# Altium PCB picr22-team-owo-mainboard.PcbDoc
Units mm, origin at the board's own origin, x right, y up, seen from the top; angles counter-clockwise.
Board outline 50 x 50 mm, 4 copper layers (Top Layer, GND1, GND, Bottom Layer), stack 1.586 mm thick; 94 components, 62 nets, 342 pads, 179 vias.
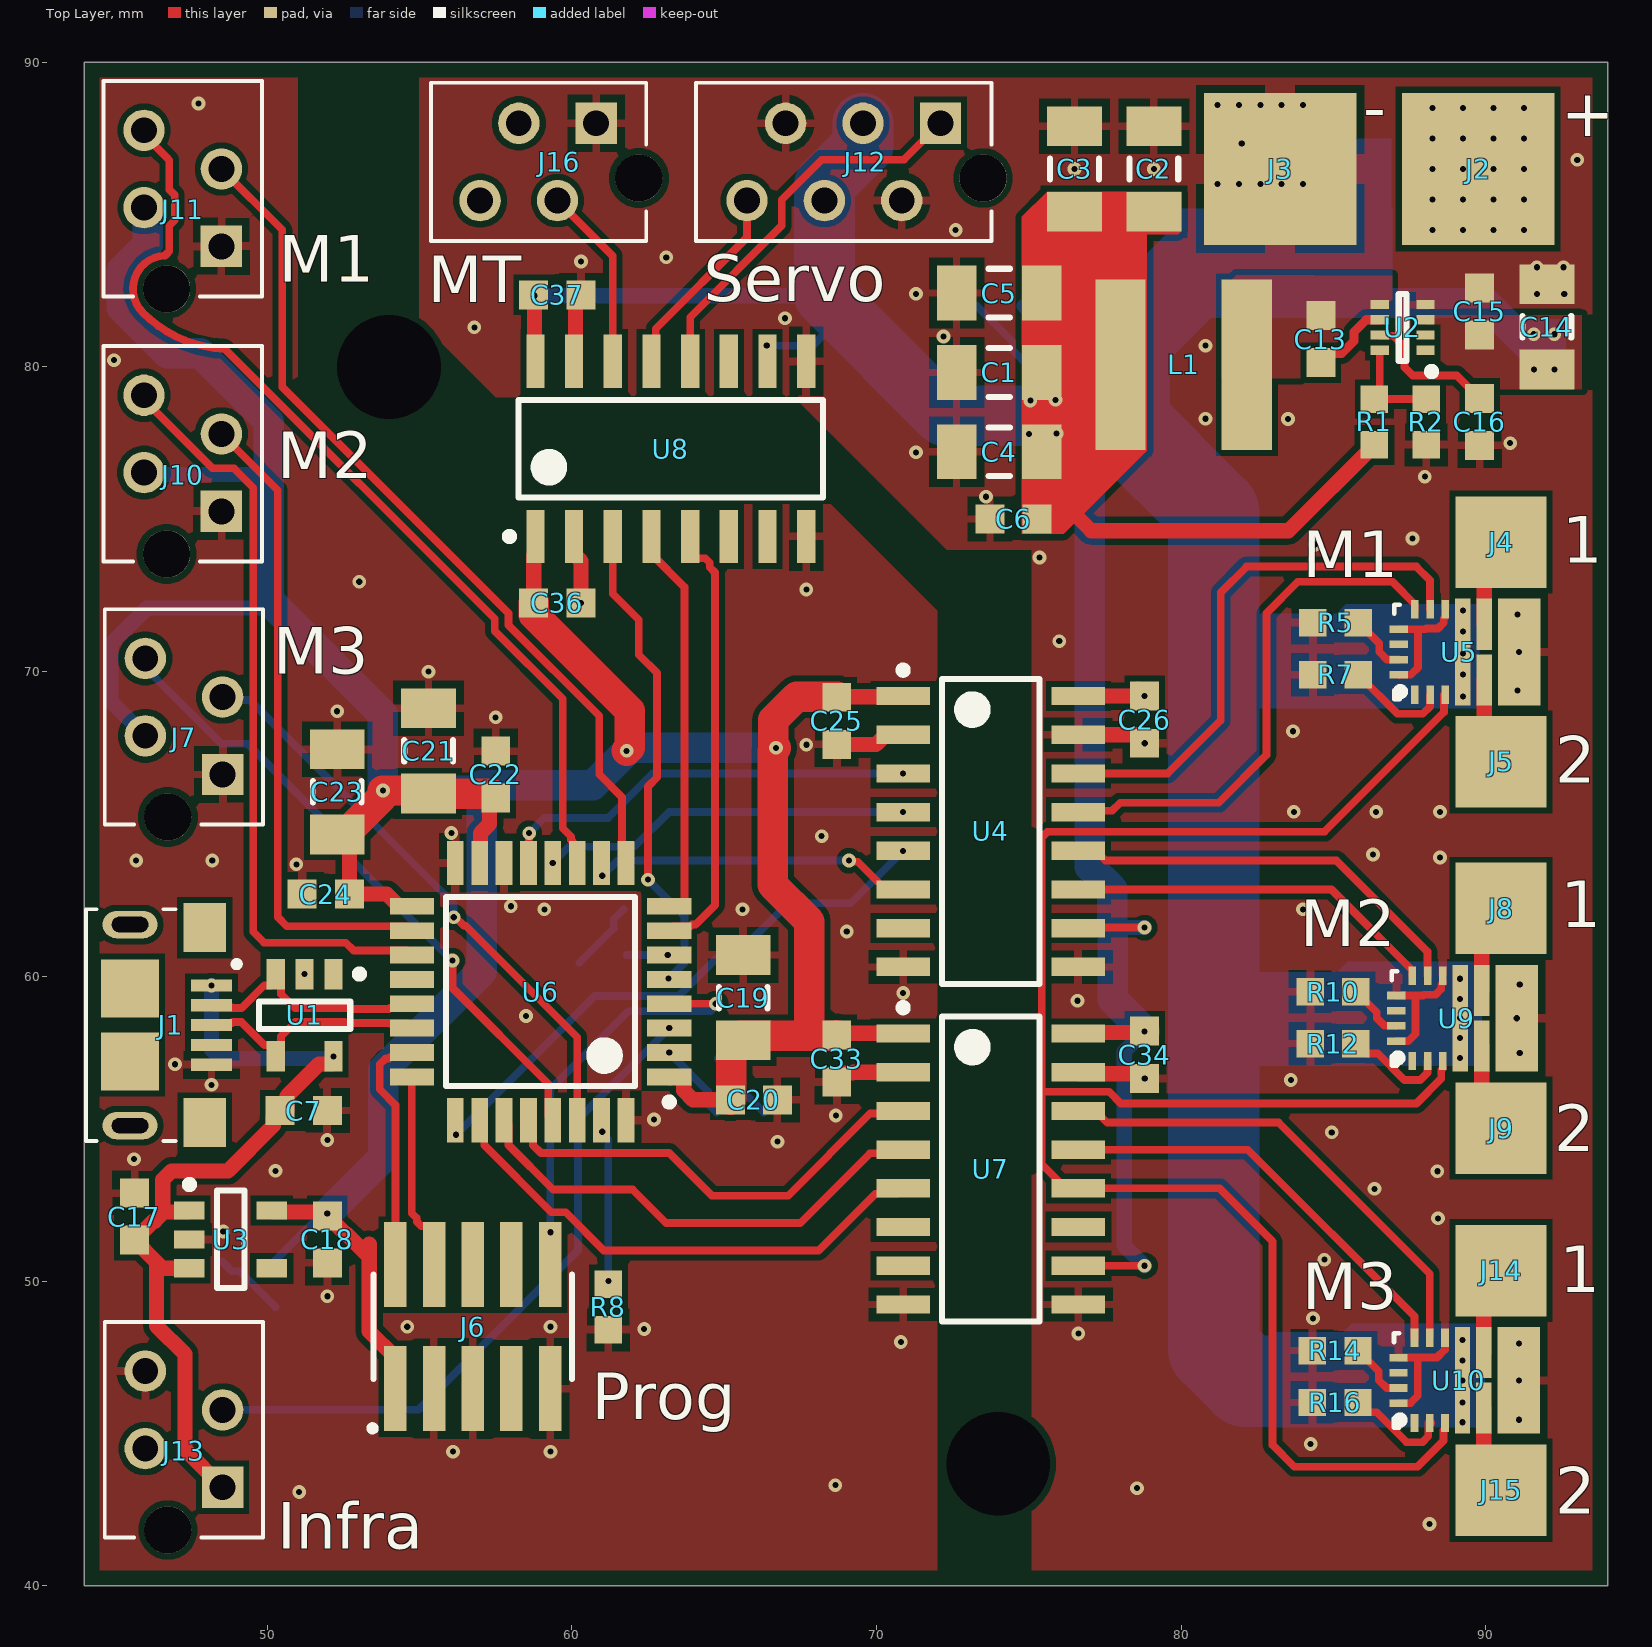
[diagram p0: Top Layer view]
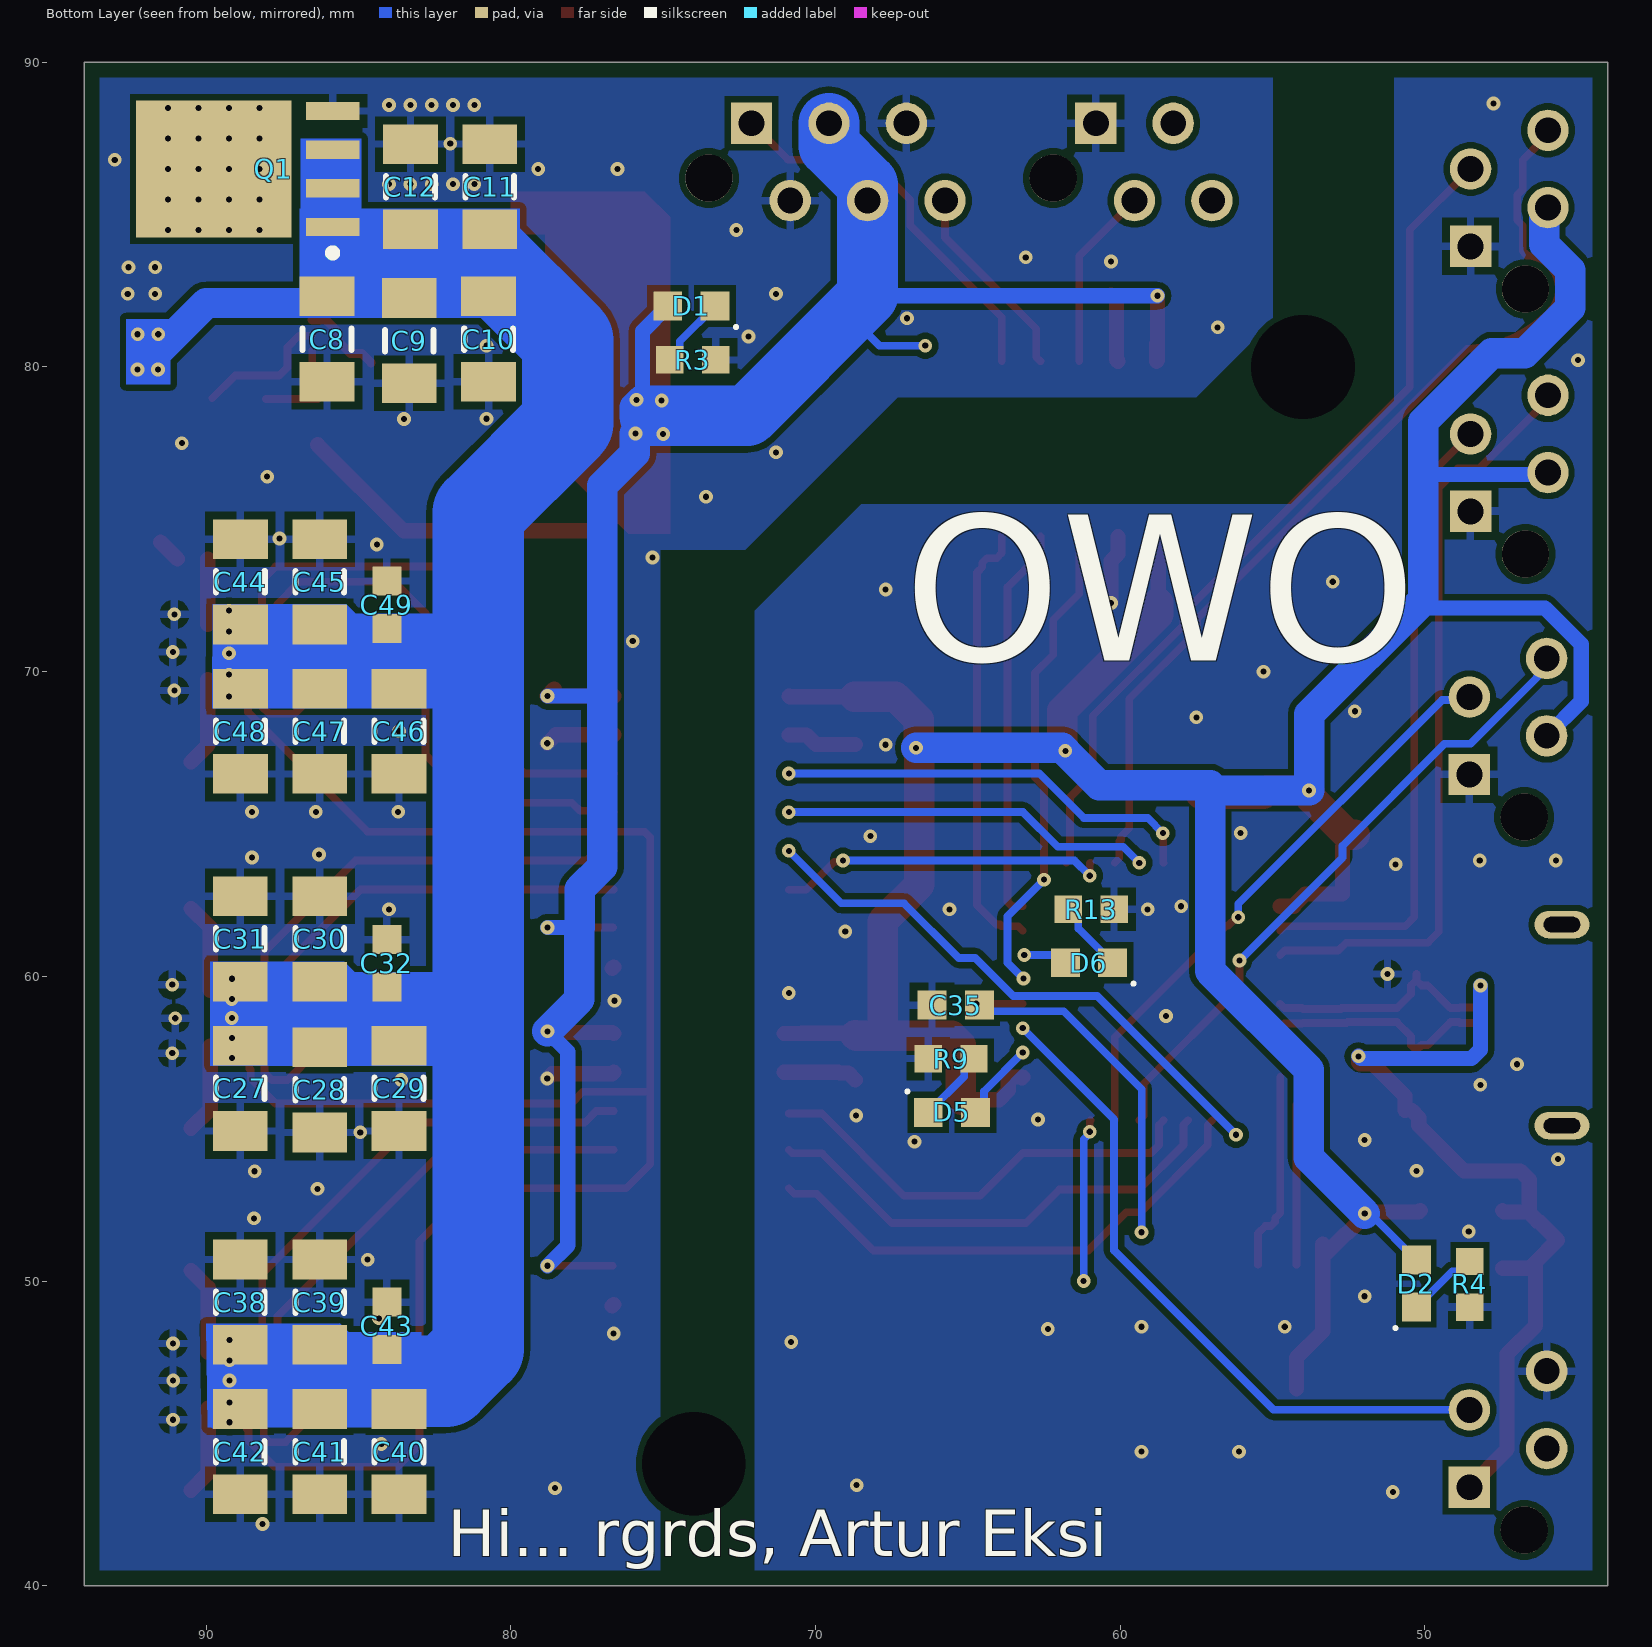
[diagram p1: Bottom Layer view, seen from below]
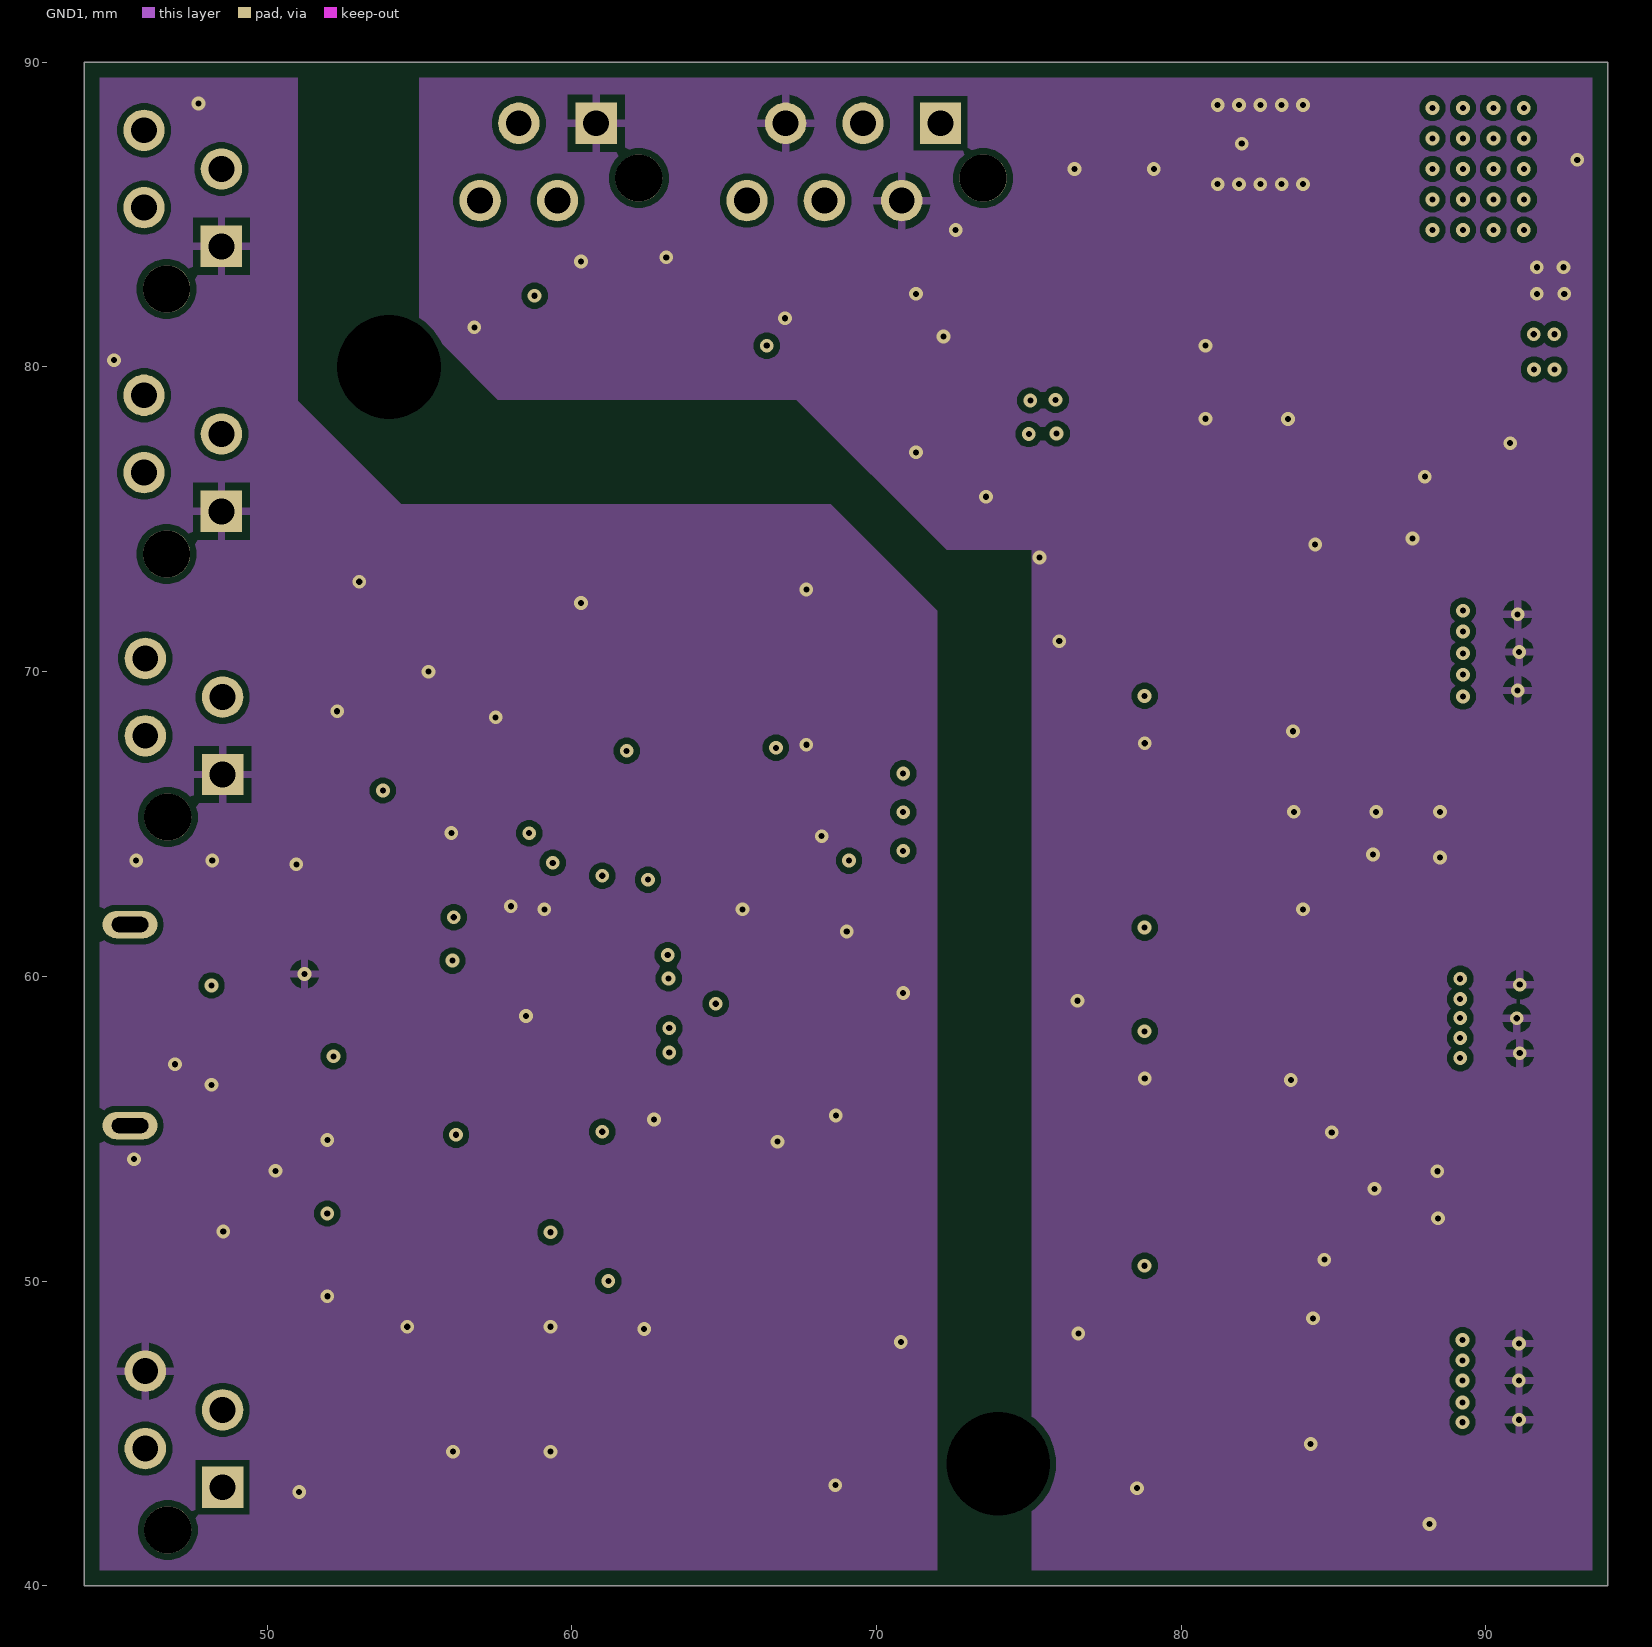
[diagram p2: GND1]
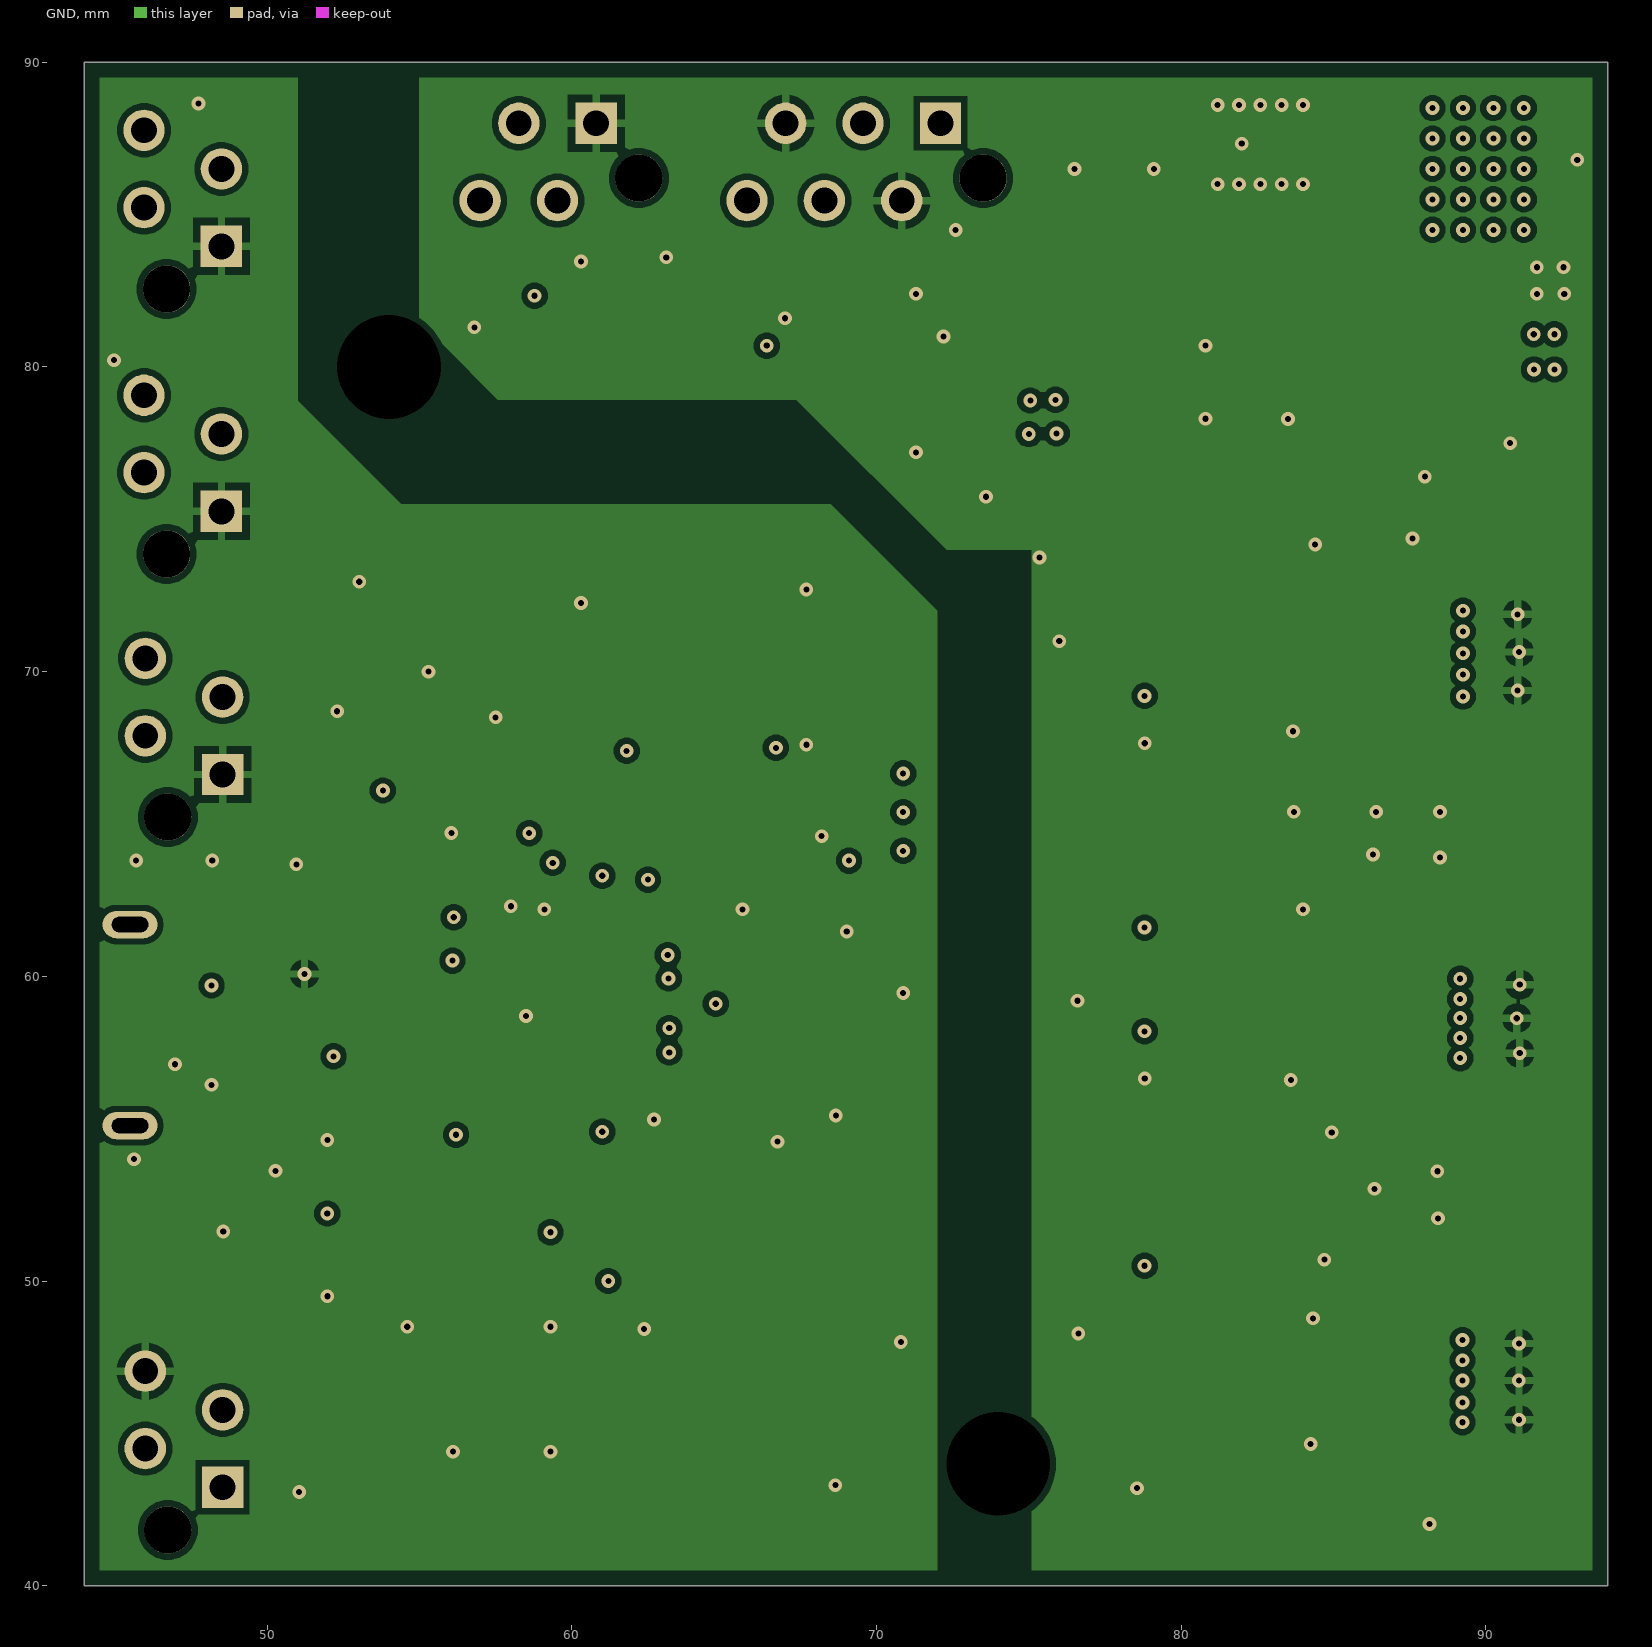
[diagram p3: GND]
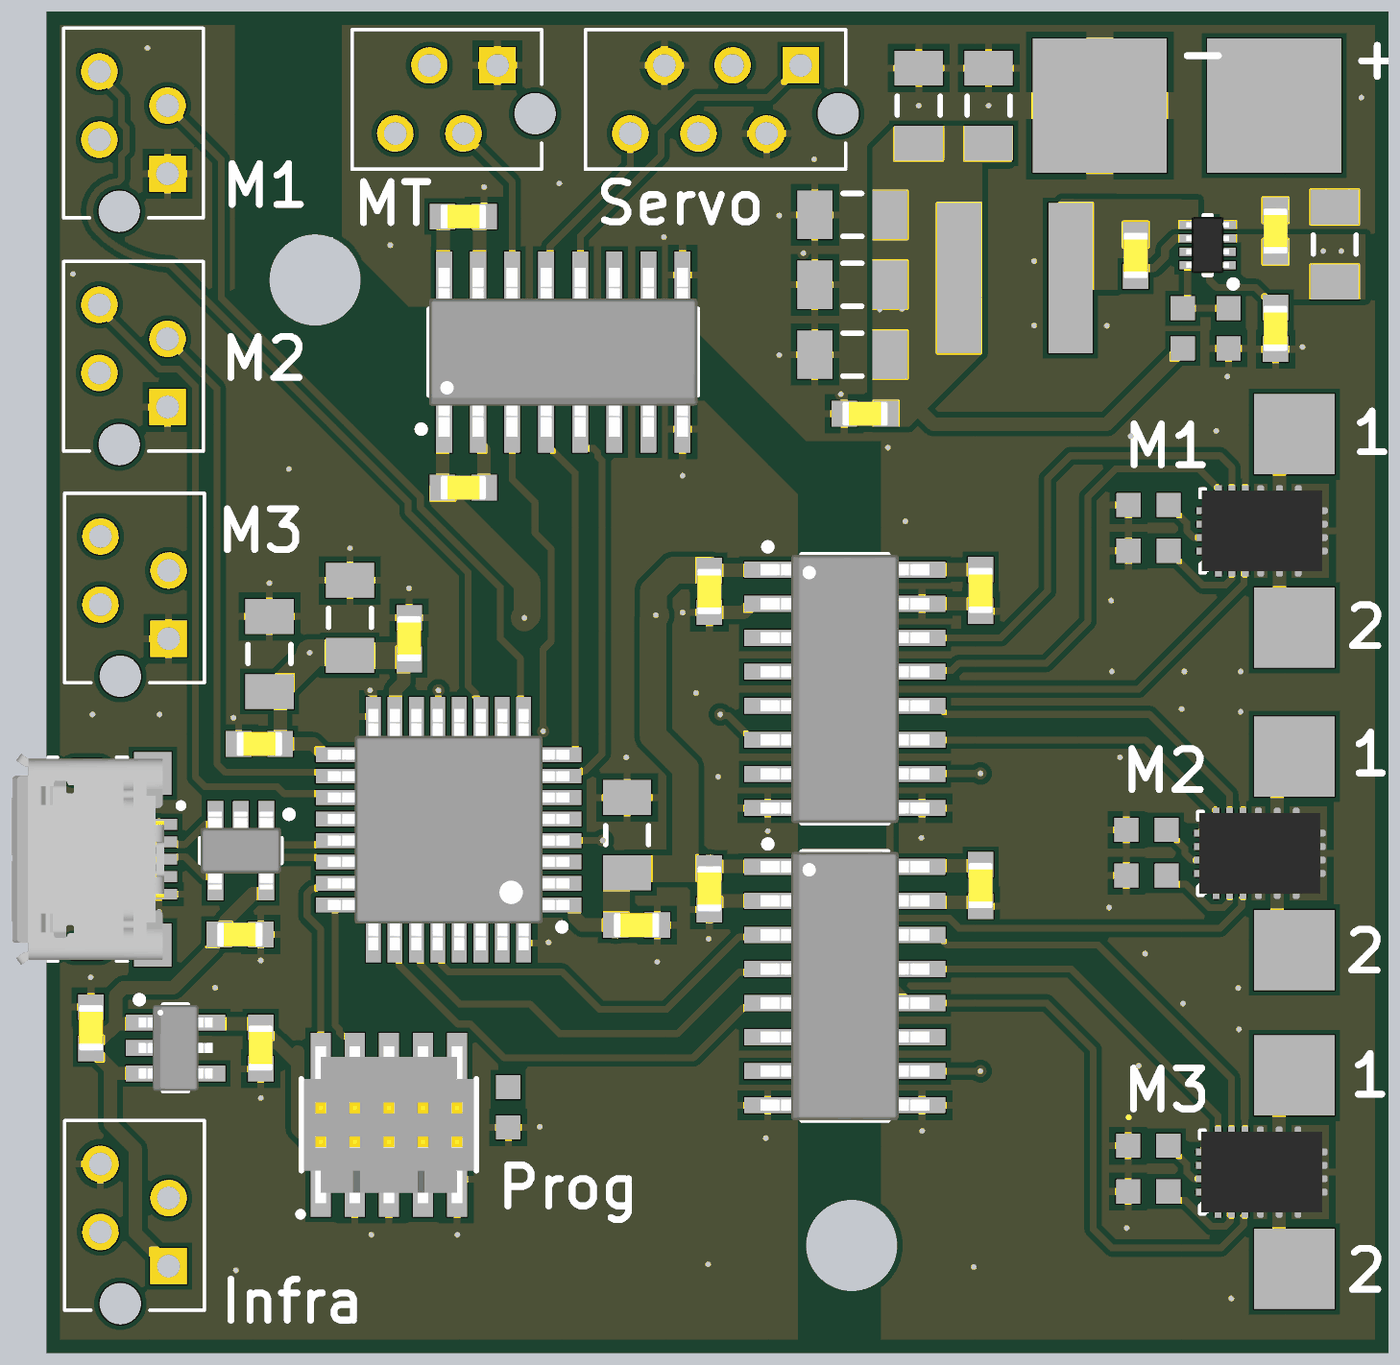
[diagram p4: 3D render of the assembled board from above, using the file's embedded part models]

## Layer stack, top to bottom
Top Solder: solder mask 0.0203, Solder Resist, Dk 3.8
Top Layer: signal copper 0.035
Dielectric 1: prepreg 0.2104, 7628, Dk 4.6
GND1: signal copper 0.0152
Dielectric 2: core 1.065, Core, Dk 4.6
GND: signal copper 0.0152
Dielectric 3: prepreg 0.2104, 7628, Dk 4.6
Bottom Layer: signal copper 0.035
Bottom Solder: solder mask 0.0203, Solder Resist, Dk 3.8

## Board outline
94,90 94,40 44,40 44,90

## Design rules (kind name [scope] priority, off if disabled: settings)
Clearance [All] p1: gap=0.2 ignorepadtopadclearanceinfootprint=TRUE except(0: Arc-Hole Track-Hole SMDPad-Hole THPad-Hole Via-Hole Fill-Hole Poly-Hole Region-Hole Text-Hole)
DiffPairsRouting DiffPairsRoutingUSB [InDifferentialPairClass('USB')] p1: maxlimit=0.2 minlimit=0.2 mostfreqgap=0.2 toplayer_minwidth=0.26 toplayer_maxwidth=0.26 toplayer_prefwidth=0.26 midlayer1_minwidth=0.26 midlayer1_maxwidth=0.26 midlayer1_prefwidth=0.26 midlayer2_minwidth=0.26 midlayer2_maxwidth=0.26 midlayer2_prefwidth=0.26 bottomlayer_minwidth=0.26 bottomlayer_maxwidth=0.26 bottomlayer_prefwidth=0.26 maxuncoupledlength=12.7
DiffPairsRouting [All] p2: maxlimit=0.254 minlimit=0.254 mostfreqgap=0.254 toplayer_minwidth=0.381 toplayer_maxwidth=0.381 toplayer_prefwidth=0.381 midlayer1_minwidth=0.381 midlayer1_maxwidth=0.381 midlayer1_prefwidth=0.381 midlayer2_minwidth=0.381 midlayer2_maxwidth=0.381 midlayer2_prefwidth=0.381 bottomlayer_minwidth=0.381 bottomlayer_maxwidth=0.381 bottomlayer_prefwidth=0.381 maxuncoupledlength=12.7
HoleSize [All] p1: absolutevalues=TRUE maxlimit=5 minlimit=0.025 maxpercent=80.000 minpercent=20.000
MinimumSolderMaskSliver [All] p1: minsoldermaskwidth=0.1
PolygonConnect PolygonConnectDIrect [InNet('NetC13_1') or InNet('VBAT') or ((ObjectKind = 'Poly') And (Name = 'GND_SWREG_IN'))] p1: connectstyle=Direct reliefconductorwidth=0.254 reliefentries=4 polygonreliefangle="90 Angle" airgapwidth=0.254
PolygonConnect [All] p2: thpad.connectstyle=Relief thpad.reliefconductorwidth=0.254 thpad.reliefentries=4 thpad.polygonreliefangle="90 Angle" thpad.airgapwidth=0.254 smdpad.connectstyle=Relief smdpad.reliefconductorwidth=0.254 smdpad.reliefentries=4 smdpad.polygonreliefangle="90 Angle" smdpad.airgapwidth=0.254 via.connectstyle=Direct via.reliefconductorwidth=0.254 via.reliefentries=4 via.polygonreliefangle="90 Angle" via.airgapwidth=0.254
RoutingVias [All] p1: holewidth=0.2 width=0.45 viastyle="Through Hole" minholewidth=0.2 minwidth=0.4 maxholewidth=1 maxwidth=1.5
SilkToSolderMaskClearance [IsPad] p1: minsilkscreentomaskgap=0.17 clearancetoexposedcopper=TRUE
SolderMaskExpansion SolderMaskExpansionVia [IsVia] p1: expansion=0.102 istentingtop=TRUE
SolderMaskExpansion [All] p2: expansion=0.05 istentingtop=FALSE
Width [All] p1: maxlimit=3 minlimit=0.254 preferedwidth=0.254
26 further rules are at their usual default settings.

## Classes and differential pairs
differential pair class USB: USBdata
differential pair USBdata: +USBdata_P -USBdata_N

## Components (designator, comment, footprint, x,y, rotation, side; value= is the part's Value field where it differs from the comment)
C1 "Generic SMD capacitor" "Capacitor 1206" 74.029,79.821 r0 top value=10uF
C2 "Generic SMD capacitor" "Capacitor 1206" 79.104,86.5 r270 top value=10uF
C3 "Generic SMD capacitor" "Capacitor 1206" 76.5,86.5 r270 top value=10uF
C4 "Generic SMD capacitor" "Capacitor 1206" 74.029,77.217 r0 top value=10uF
C5 "Generic SMD capacitor" "Capacitor 1206" 74.029,82.426 r0 top value=10uF
C6 "Generic SMD capacitor" "Capacitor 0603" 74.5,75.013 r180 top value=100nF
C7 "Generic SMD capacitor" "Capacitor 0603" 51.2,55.596 r180 top value=100nF
C8 "Generic SMD capacitor" "Capacitor 1206" 86.033,80.916 r90 bottom value=10uF
C9 "Generic SMD capacitor" "Capacitor 1206" 83.333,80.866 r90 bottom value=10uF
C10 "Generic SMD capacitor" "Capacitor 1206" 80.729,80.916 r90 bottom value=10uF
C11 "Generic SMD capacitor" "Capacitor 1206" 80.691,85.916 r270 bottom value=10uF
C12 "Generic SMD capacitor" "Capacitor 1206" 83.296,85.916 r270 bottom value=10uF
C13 "Generic SMD capacitor" "Capacitor 0603" 84.587,80.916 r270 top value=100nF
C14 "Generic SMD capacitor" "Capacitor 1206" 92.004,81.319 r270 top value=10uF
C15 "Generic SMD capacitor" "Capacitor 0603" 89.8,81.825 r270 top value=100nF
C16 "Generic SMD capacitor" "Capacitor 0603" 89.8,78.196 r270 top value=33nF
C17 "Generic SMD capacitor" "Capacitor 0603" 45.647,52.115 r270 top value=1uF
C18 "Generic SMD capacitor" "Capacitor 0603" 51.974,51.365 r90 top value=1uF
C19 "Generic SMD capacitor" "Capacitor 1206" 65.629,59.3 r270 top value=4.7uF
C20 "Generic SMD capacitor" "Capacitor 0603" 65.979,55.946 r180 top value=100nF
C21 "Generic SMD capacitor" "Capacitor 1206" 55.3,67.4 r270 top value=4.7uF
C22 "Generic SMD capacitor" "Capacitor 0603" 57.504,66.625 r270 top value=100nF
C23 "Generic SMD capacitor" "Capacitor 1206" 52.3,66.054 r270 top value=4.7uF
C24 "Generic SMD capacitor" "Capacitor 0603" 51.925,62.7 r0 top value=100nF
C25 "Generic SMD capacitor" "Capacitor 0603" 68.696,68.385 r90 top value=100nF
C26 "Generic SMD capacitor" "Capacitor 0603" 78.804,68.425 r90 top value=100nF
C27 "Generic SMD capacitor" "Capacitor 1206" 88.88,56.323 r90 bottom value=10uF
C28 "Generic SMD capacitor" "Capacitor 1206" 86.275,56.273 r90 bottom value=10uF
C29 "Generic SMD capacitor" "Capacitor 1206" 83.671,56.323 r90 bottom value=10uF
C30 "Generic SMD capacitor" "Capacitor 1206" 86.275,61.227 r270 bottom value=10uF
C31 "Generic SMD capacitor" "Capacitor 1206" 88.88,61.227 r270 bottom value=10uF
C32 "Generic SMD capacitor" "Capacitor 0603" 84.071,60.427 r270 bottom value=100nF
C33 "Generic SMD capacitor" "Capacitor 0603" 68.696,57.3 r90 top value=100nF
C34 "Generic SMD capacitor" "Capacitor 0603" 78.804,57.425 r90 top value=100nF
C35 "Generic SMD capacitor" "Capacitor 0603" 65.4,59.054 r180 bottom value=100nF
C36 "Generic SMD capacitor" "Capacitor 0603" 59.525,72.257 r180 top value=100nF
C37 "Generic SMD capacitor" "Capacitor 0603" 59.525,82.366 r180 top value=100nF
C38 "Generic SMD capacitor" "Capacitor 1206" 88.88,49.304 r270 bottom value=10uF
C39 "Generic SMD capacitor" "Capacitor 1206" 86.275,49.304 r270 bottom value=10uF
C40 "Generic SMD capacitor" "Capacitor 1206" 83.671,44.4 r90 bottom value=10uF
C41 "Generic SMD capacitor" "Capacitor 1206" 86.275,44.4 r90 bottom value=10uF
C42 "Generic SMD capacitor" "Capacitor 1206" 88.88,44.4 r90 bottom value=10uF
C43 "Generic SMD capacitor" "Capacitor 0603" 84.071,48.529 r270 bottom value=100nF
C44 "Generic SMD capacitor" "Capacitor 1206" 88.88,72.948 r270 bottom value=10uF
C45 "Generic SMD capacitor" "Capacitor 1206" 86.275,72.948 r270 bottom value=10uF
C46 "Generic SMD capacitor" "Capacitor 1206" 83.671,68.044 r90 bottom value=10uF
C47 "Generic SMD capacitor" "Capacitor 1206" 86.275,68.044 r90 bottom value=10uF
C48 "Generic SMD capacitor" "Capacitor 1206" 88.88,68.044 r90 bottom value=10uF
C49 "Generic SMD capacitor" "Capacitor 0603" 84.071,72.198 r270 bottom value=100nF
D1 "LED" "DIODE 0603" 74.075,82 r180 bottom
D2 "LED" "DIODE 0603" 50.279,49.915 r270 bottom
D5 "LED" "DIODE 0603" 65.525,55.534 r0 bottom
D6 "LED" "DIODE 0603" 61.025,60.446 r180 bottom
J1 "10118193-0001LF" "USB port" 45.5,58.4 r270 top
J2 "BAT+" "5x5mm pad" 89.75,86.5 r90 top
J3 "BAT-" "5x5mm pad" 83.25,86.5 r90 top
J4 "M1OUT1" "3x3mm pad" 90.5,74.25 r90 top
J5 "M1OUT2" "3x3mm pad" 90.5,67.038 r90 top
J6 "FTSH-105-XX-X-DV" SAMTEC_FTSH-105-XX-X-DV 56.75,48.5 r0 top
J7 "215079-4" CONN_215079-4_TYC 44.44,72.326 r270 top
J8 "M1OUT1" "3x3mm pad" 90.5,62.229 r90 top
J9 "M1OUT2" "3x3mm pad" 90.5,55.017 r90 top
J10 "215079-4" CONN_215079-4_TYC 44.4,80.963 r270 top
J11 "215079-4" CONN_215079-4_TYC 44.4,89.66 r270 top
J12 "215079-6" CONN_215079-6_TYC 63.825,83.88 r0 top
J13 "215079-4" CONN_215079-4_TYC 44.44,48.93 r270 top
J14 "M1OUT1" "3x3mm pad" 90.5,50.343 r90 top
J15 "M1OUT2" "3x3mm pad" 90.5,43.131 r90 top
J16 "215079-4" CONN_215079-4_TYC 55.1,83.9 r0 top
L1 "Inductor" "Inductor ?" 80.083,80.069 r270 top value=5.6uF
Q1 "BUK6Y10-30P" DPAK127P600X120-5N 88.65,86.5 r0 bottom
R1 "Generic SMD resistor" "Resistor 0603" 86.342,78.196 r270 top value=53.6k
R2 "Generic SMD resistor" "Resistor 0603" 88.046,78.196 r90 top value=10.2k
R3 "Generic SMD resistor" "Resistor 0603" 74.029,80.234 r0 bottom value=3k
R4 "Generic SMD resistor" "Resistor 0603" 48.524,49.89 r90 bottom value=1.3k
R5 "Generic SMD resistor" "Resistor 0603" 85.067,71.607 r0 top value=100k
R7 "Generic SMD resistor" "Resistor 0603" 85.067,69.902 r0 top value=2.7k
R8 "Generic SMD resistor" "Resistor 0603" 61.2,49.15 r90 top value=optional
R9 "Generic SMD resistor" "Resistor 0603" 65.55,57.3 r180 bottom value=1.3k
R10 "Generic SMD resistor" "Resistor 0603" 84.986,59.498 r0 top value=100k
R12 "Generic SMD resistor" "Resistor 0603" 84.986,57.793 r0 top value=2.7k
R13 "Generic SMD resistor" "Resistor 0603" 60.95,62.2 r0 bottom value=1.3k
R14 "Generic SMD resistor" "Resistor 0603" 85.056,47.716 r0 top value=100k
R16 "Generic SMD resistor" "Resistor 0603" 85.056,46.012 r0 top value=2.7k
U1 "CM1223-02SO" SOT95P280X145-5N 51.229,58.725 r270 top
U2 "XTPS62933DRLR" "SOT-5X3 8N" 87.271,81.3 r180 top
U3 "NCP164CSN330T1G" TSOP95P280X110-5N 48.801,51.365 r0 top
U4 "MAX14930DASE" SOIC127P630X175-16N 73.75,64.755 r0 top
U5 "PDRV8243HRXYQ1" RXY0014A-MFG 89.296,70.644 r90 top
U6 "STM32G441KxT" TQFP80P900X900X160-32N 58.975,59.5 r180 top
U7 "MAX14930DASE" SOIC127P630X175-16N 73.75,53.676 r0 top
U8 "MAX14930DASE" SOIC127P630X175-16N 63.25,77.311 r90 top
U9 "PDRV8243HRXYQ1" RXY0014A-MFG 89.215,58.623 r90 top
U10 "PDRV8243HRXYQ1" RXY0014A-MFG 89.286,46.737 r90 top

## Footprints (in the part's own frame and the unit in brackets; to place one, negate y for a bottom-side part, rotate by r counter-clockwise, add the part's x,y. Pads: shape width x height; smd on the part's side, far side on the other; paste and mask are expansions set on the pad)
"3x3mm pad" [mm]
  rect 3x3 smd: 1(0,0)
"5x5mm pad" [mm]
  rect 5x5 smd: 1(0,0)
"Capacitor 0603" [mm] "Chip Capacitor, 2-Leads, Body 1.60x0.80mm, IPC Medium Density"
  rect 0.95x0.95 smd: 1(-0.775,0) 2(0.775,0)
  body extent -0.85,-0.45 0.85,0.45, height 0.6
"Capacitor 1206" [mm]
  rect 1.3x1.8 smd: 1(-1.4,0) 2(1.4,0)
  silkscreen extent -0.35,-0.8 0.35,0.8, body extent -1.7,-0.9 1.7,0.9, height 0.55
CONN_215079-4_TYC [mm]
  rect 1.358x1.358 hole 0.85: 1(5.7,4.1)
  round 1.358 hole 0.85: 2(4.43,1.56) 3(3.16,4.1) 4(1.89,1.56)
  round 1.55 hole 1.55 unplated: ""(7.1,2.3)
  silkscreen extent 0.27,0.23 7.34,5.43
CONN_215079-6_TYC [mm]
  rect 1.358x1.358 hole 0.85: 1(8.275,4.12)
  round 1.358 hole 0.85: 2(7.005,1.58) 3(5.735,4.12) 4(4.465,1.58) 5(3.195,4.12) 6(1.925,1.58)
  round 1.55 hole 1.55 unplated: ""(9.675,2.32)
  silkscreen extent 0.25,0.25 9.95,5.45
"DIODE 0603" [mm]
  rect 0.95x0.95 smd: 1(-0.775,0) 2(0.775,0)
  silkscreen extent 1.41,-0.74 1.51,-0.64, body extent -0.85,-0.45 0.85,0.45, height 0.6
DPAK127P600X120-5N [mm] "TO, 5-Pads, Body 5.15x5.86mm (max), IPC Medium Density"
  rect 1.75x0.6 smd: 1(-2.8,1.905) 2(-2.8,0.635) 3(-2.8,-0.635) 4(-2.8,-1.905)
  rect 5.1x4.5 smd: 5(1.1,0)
  silkscreen extent -2.92,2.63 -2.67,2.88, body extent -2.85,-2.5 3.15,2.5, height 1.2
"Inductor ?" [mm]
  rect 5.6x1.65 smd: 1(0,2.075) 2(0,-2.075)
  body extent -3.3,-3.2 3.3,3.2, height 5.8
"Resistor 0603" [mm] "Chip Resistor, 2-Leads, Body 1.60x0.80mm, IPC Medium Density"
  rect 0.9x0.9 smd: 1(-0.75,0) 2(0.75,0)
  body extent -0.85,-0.45 0.85,0.45, height 0.6
RXY0014A-MFG [mm]
  rect 0.6x0.25 smd paste+0 mask-0.292: 1(-1.4,1.625) 2(-1.4,1.125) 3(-1.4,0.625) 8(1.4,0.625) 9(1.4,1.125) 10(1.4,1.625)
  rect 3.5x0.5 smd paste-1.737 mask-1.74: 4(0,0.05)
  rect 1.675x0.5 smd paste-0.825 mask-0.826: 5(-0.913,-0.65) 7(0.912,-0.65)
  rect 3.5x1.4 smd paste-1.737 mask-1.74: 6(0,-1.8)
  rect 0.25x0.6 smd paste+0 mask-0.292: 11(0.75,2.15) 12(0.25,2.15) 13(-0.25,2.15) 14(-0.75,2.15)
  silkscreen extent -1.55,1.97 1.55,2.3, body extent -1.5,-2.25 1.5,2.25, height 1
SAMTEC_FTSH-105-XX-X-DV [mm]
  rect 0.74x2.79 smd: 01(-2.54,-2.035) 02(-2.54,2.035) 03(-1.27,-2.035) 04(-1.27,2.035) 05(0,-2.035) 06(0,2.035) 07(1.27,-2.035) 08(1.27,2.035) 09(2.54,-2.035) 10(2.54,2.035)
  silkscreen extent -3.39,-3.43 3.26,1.72, body extent -3.17,-2.92 3.17,2.92, height 6.11
SOIC127P630X175-16N [mm] "SOIC, 16-Leads, Body 9.90x3.90mm, Pitch 1.27mm, IPC Medium Density"
  rect 1.75x0.6 smd: 1(-2.875,4.445) 2(-2.875,3.175) 3(-2.875,1.905) 4(-2.875,0.635) 5(-2.875,-0.635) 6(-2.875,-1.905) 7(-2.875,-3.175) 8(-2.875,-4.445) 9(2.875,-4.445) 10(2.875,-3.175) 11(2.875,-1.905) 12(2.875,-0.635) 13(2.875,0.635) 14(2.875,1.905) 15(2.875,3.175) 16(2.875,4.445)
  silkscreen extent -3,-5 1.6,5.42, body extent -3.15,-5 3.15,5, height 1.75
SOT95P280X145-5N [mm] "SOT23, 5-Leads, Body 2.90x2.80mm, Pitch 0.95mm, IPC Medium Density"
  rect 1x0.6 smd: 1(-1.35,0.95) 2(-1.35,0) 3(-1.35,-0.95) 4(1.35,-0.95) 5(1.35,0.95)
  silkscreen extent -1.47,-1.5 0.45,1.93, body extent -1.45,-1.5 1.45,1.5, height 1.45
"SOT-5X3 8N" [mm] "TSSOP, 8-Leads, Body 2.10x1.20mm, Pitch 0.50mm, IPC Medium Density"
  rect 0.6x0.3 smd: 1(-0.75,0.75) 2(-0.75,0.25) 3(-0.75,-0.25) 4(-0.75,-0.75) 5(0.75,-0.75) 6(0.75,-0.25) 7(0.75,0.25) 8(0.75,0.75)
  silkscreen extent -1.08,-1.1 0.13,1.57, body extent -0.8,-1.05 0.8,1.05, height 0.6
TQFP80P900X900X160-32N [mm] "TQFP, 32-Leads, Body 7.00x7.00mm, Pitch 0.80mm, IPC Medium Density"
  rect 1.45x0.55 smd: 1(-4.225,2.8) 2(-4.225,2) 3(-4.225,1.2) 4(-4.225,0.4) 5(-4.225,-0.4) 6(-4.225,-1.2) 7(-4.225,-2) 8(-4.225,-2.8) 17(4.225,-2.8) 18(4.225,-2) 19(4.225,-1.2) 20(4.225,-0.4) 21(4.225,0.4) 22(4.225,1.2) 23(4.225,2) 24(4.225,2.8)
  rect 0.55x1.45 smd: 9(-2.8,-4.225) 10(-2,-4.225) 11(-1.2,-4.225) 12(-0.4,-4.225) 13(0.4,-4.225) 14(1.2,-4.225) 15(2,-4.225) 16(2.8,-4.225) 25(2.8,4.225) 26(2,4.225) 27(1.2,4.225) 28(0.4,4.225) 29(-0.4,4.225) 30(-1.2,4.225) 31(-2,4.225) 32(-2.8,4.225)
  silkscreen extent -4.35,-3.1 3.1,3.75, body extent -4.5,-4.5 4.5,4.5, height 1.6
TSOP95P280X110-5N [mm] "TSOP, 5-Leads, Body 3.00x1.50mm, Pitch 0.95mm, IPC Medium Density"
  rect 1x0.6 smd: 1(-1.35,0.95) 2(-1.35,0) 3(-1.35,-0.95) 4(1.35,-0.95) 5(1.35,0.95)
  silkscreen extent -1.47,-1.6 0.45,1.92, body extent -1.38,-1.6 1.38,1.6, height 1.1
"USB port" [mm]
  rect 0.4x1.35 smd: 1(-1.3,2.675) 2(-0.65,2.675) 3(0,2.675) 4(0.65,2.675) 5(1.3,2.675)
  rect 1.6x1.4 smd: S1(-3.2,2.45) S2(3.2,2.45)
  rect 1.9x1.9 smd: S3(1.2,0) S4(-1.2,0)
  oval 0.9x1.8 hole 0.5 slot 1.2 at 90 deg: S5(-3.3,0) S6(3.3,0)
  silkscreen extent -3.8,-1.45 3.8,3.6, body extent -3.93,-2.79 3.93,2.87, height 2.88

## Part data
C1 C2 C3 C4 C5 C6 C7 C8 C9 C10 C11 C12 C13 C14 C15 C16 C17 C18 C19 C20 C21 C22 C23 C24 C25 C26 C27 C28 C29 C30 C31 C32 C33 C34 C35 C36 C37 C38 C39 C40 C41 C42 C43 C44 C45 C46 C47 C48 C49: library part Capacitor
J1: "USB - micro B USB 2.0 Receptacle Connector 5 Position Surface Mount, Right Angle; Through Hole", Package=None, Availability=Unavailable, MF="Amphenol ICC", MP=10118193-0001LF, Price=None, SnapEDA_Link=https://www.snapeda.com/parts/10118193-0001LF/Amphenol%20FCI/view-part/2758989/?ref=snap
J2 J3 J4 J5 J8 J9 J14 J15: library part "Connector pad"
J6: "Connector Header Surface Mount 10 position 0.050\" (1.27mm)", Package=None, Availability=Unavailable, MP=FTSH-105-XX-X-DV, Price=None
J7 J10 J11 J13 J16: "No Description Available", Mfr_Name="TE Connectivity", Copyright="Copyright (C) 2022 Ultra Librarian. All rights reserved.", Manufacturer_Part_Number=215079-4, RefDes=RefDes, Type=DEV
R1 R2 R3 R4 R5 R7 R8 R9 R10 R12 R13 R14 R16: library part Resistor
U4 U7 U8: library part MAX14930DASE+
U5 U9 U10: "No Description Available", Mfr_Name="Texas Instruments", Copyright="Copyright (C) 2022 Ultra Librarian. All rights reserved.", Manufacturer_Part_Number=PDRV8243HRXYQ1, RefDes=RefDes, Type=DEV

## Free pads (board coordinates)
  round 1.55 hole 3.4 unplated: 2(54,80) 2(74,44)

## Via types
v1: diameter 0.45, hole 0.2, Top Layer to Bottom Layer, tented both sides, 179 vias

## Nets (pads, with @x,y where several pads share a name; then routed paths per layer and width w, separated by ;. In a path a pad name is that pad's centre, name@x,y a point inside that pad or via, vN(x,y) a via of type N, cw(c..) or ccw(c..) an arc to the next point about the centre after c; other vN are vias at no path point)
+3.3: C18.2 C19.2 C20.2 C21.2 C22.2 C23.2 C24.2 C25.2 C33.2 C36.2 D2.1 J6.01 J7.2 J10.2 J11.2 U3.5 U4.1 U6.1 U6.15 U6.17 U7.1 U8.1 | length 124.5
  Top Layer w0.5: U3.5 50.201,52.265 C18.2@51.849,52.265 ; C18.2 52.553,51.561 52.589,51.561 53.327,50.824 ; C23.2 52.7,64.254 C24.2 53.925,62.7 54.275,62.35 54.275,62.325 54.3,62.3 U6.17 ; 53.352,51.209 53.352,48.348 54.21,47.49 J6.01 ; U6.15 57,63.75 57,64.7 57.3,65 57.3,65.646 C22.2 ; C36.2 58.75,73.806 58.805,73.861 U8.1 ; U6.1@63.225,56.675 U6.1 63.65,56.7 63.675,56.675 63.675,56.25 63.979,55.946 C20.2 ; C33.2@68.71,58.135 70.448,58.135 70.463,58.121 U7.1 U7.1@71.038,58.121 ; C25.2@68.713,69.178 70.858,69.178 U4.1@70.875,69.195
  Top Layer w1: C23.2 52.55,64.654 53.8,65.904 v1(53.8,66.1) 55.2,66.1 C21.2 C22.2@57.354,66 ; C36.2 58.75,71.867 61.9,68.717 61.9,67.5 v1(61.8,67.4) ; C20.2 65.229,55.971 65.229,57.75 65.529,58.05 67.75,58.05 ; C33.2 68.671,58.05 67.75,58.05 ; C25.2@68.713,69.178 67.378,69.178 66.614,68.414 66.614,67.586 v1(66.7,67.5) 66.6,67.4 66.6,63 67.8,61.8 67.8,58.1 67.75,58.05
  Bottom Layer w0.254: D2.1 51.766,52.177 51.937,52.177 v1(51.974,52.215)
  Bottom Layer w0.5: J10.2 46.02,76.473 50.047,76.473 50.048,76.473 ; J7.2 44.871,69.025 44.871,70.903 46.058,72.091 50.309,72.091
  Bottom Layer w1: J10.2@45.892,76.601 J10.2 ; J11.2 46.028,85.162 46.028,84.908 46.081,84.856 46.081,84.027 45.225,83.171 45.225,81.949 46.722,80.452 47.801,80.452 49.755,78.498 50.048,78.205 50.048,76.473 ; J7.2 J7.2@46,67.992 ; 50.047,76.473 50.047,72.353 53.8,68.6 v1(53.8,66.1) 57.05,66.1 ; v1(51.974,52.215) 53.804,54.045 53.804,56.929 57.05,60.175 57.05,65.9 ; 57.05,66.275 60.683,66.275 61.8,67.392 v1(61.8,67.4) 61.9,67.5 v1(66.7,67.5)
+5: C1.2 C2.2 C3.2 C4.2 C5.2 C6.1 C26.2 C34.2 C37.2 D1.1 J12.3 J12.4 L1.2 R1.2 U4.10 U4.16 U7.10 U7.16 U8.10 U8.16 | length 89.3
  Top Layer w0.254: U4.10@76.645,61.6 v1(78.8,61.6) ; U7.10@76.665,50.5 v1(78.8,50.5)
  Top Layer w0.5: v1(58.778,82.338) 58.778,80.214 U8.16 U8.16@58.805,80.761 ; 76.425,75.25 77.05,74.625 83.521,74.625 R1.2 ; U7.16 76.665,58.16 78.765,58.16 v1(78.8,58.196) C34.2 ; U4.16@76.625,69.195 U4.16@76.628,69.197 ; U4.16 C26.2 v1(78.8,69.204) C26.2@78.579,69.425 ; L1.2 78.008,78.094 L1.2@78.583,77.519
  Bottom Layer w0.254: v1(66.4,80.7) 67.9,80.7 68.7,81.5
  Bottom Layer w0.5: v1(58.778,82.338) 68.29,82.338 ; D1.1 75.679,81.171 v1@75.679,78.922 ; 77,69.2 78.796,69.2 v1(78.8,69.204) ; 77.735,61.6 77.754,61.6 v1(78.8,61.6) ; v1(78.8,50.5) 78.129,51.171 78.129,57.525 v1(78.8,58.196)
  Bottom Layer w1: 75.429,78.4 75.712,78.117 ; v1@75.679,78.922 75.929,78.671 75.929,78.4 ; v1@75.929,77.817 75.929,77.171 77,76.1 77,69.2 77,63.6 77.735,62.865 77.735,61.6 ; 77.754,61.6 77.754,59.242 v1(78.8,58.196)
  Bottom Layer w2: J12.3 69.56,87.26 68.29,85.99 68.29,82.338 72.228,78.4 75.429,78.4
  other v1: 75,77.8 75.912,77.817 75.05,78.9 75.879,78.922
DGND: C7.1 C17.1 C18.1 C19.1 C20.1 C21.1 C22.1 C23.1 C24.1 C25.1 C33.1 C35.1 C36.1 J1.5 J6.03 J6.05 J6.09 J7.1 J10.1 J11.1 J13.4 R4.1 R8.1 R9.1 R13.1 U1.2 U3.2 U4.2 U4.8 U6.14 U6.16 U6.32 U7.2 U7.8 U8.2 U8.8 | length 7
  Top Layer w0.5: U8.2 60.075,73.861 60.3,73.636 v1(60.3,72.257) ; C33.1@68.696,56.6 68.921,56.825 69.224,56.825 69.25,56.851 U7.2 U7.2@71.038,56.851 ; C25.1 69.985,67.61 70.3,67.925 U4.2@70.875,67.925
  other v1: 51.05,43.075 68.65,43.3 56.1,44.4 59.3,44.4 70.8,48 62.375,48.425 54.6,48.5 59.3,48.5 51.975,49.5 48.558,51.626 50.274,53.615 45.633,53.999 66.75,54.575 51.975,54.625 62.7,55.3 68.666,55.431 48.178,56.44 46.974,57.115 58.5,58.7 70.875,59.45 51.229,60.075 69.025,61.475 59.1,62.2 65.6,62.2 58,62.3 50.958,63.676 45.7,63.8 48.2,63.8 68.2,64.6 56.048,64.704 67.7,67.6 57.5,68.5 52.3,68.7 55.3,70 67.7,72.7 53.025,72.95 44.975,80.225 47.75,88.65
DM1IN1: U4.3 U6.13 | length 14.1
  Top Layer w0.254: U6.13 58.587,63.738 58.587,64.687 v1(58.6,64.7) ; U4.3@70.875,66.655 v1(70.875,66.66)
  Bottom Layer w0.254: v1(58.6,64.7) 59.1,65.2 61.2,65.2 62.66,66.66 v1(70.875,66.66)
DM1IN2: U4.4 U6.12 | length 12.2
  Bottom Layer w0.254: v1(59.375,63.725) 59.904,64.254 62.054,64.254 63.19,65.39 v1(70.875,65.39)
DM2IN1: U4.5 U6.25 | length 18.5
  Top Layer w0.254: U4.5@70.875,64.115 v1(70.875,64.12)
  Bottom Layer w0.254: v1(56.2,54.8) 60.754,59.354 63.512,59.354 64.758,60.6 65.3,60.6 67.1,62.4 69.155,62.4 v1(70.875,64.12)
DM2IN2: U4.6 U6.10 | length 10.9
  Top Layer w0.254: U6.10 61,63.7 v1(61,63.3) ; v1(69.1,63.8) 69.138,63.762 69.388,63.762 70.305,62.845 U4.6@70.875,62.845
  Bottom Layer w0.254: v1(61,63.3) 61.5,63.8 v1(69.1,63.8)
DM3IN1: U6.28 U7.3 | length 14.8
  Top Layer w0.254: U6.28 58.723,55.127 58.723,54.465 58.988,54.2 63.2,54.2 64.6,52.8 67.1,52.8 69.8,55.5 U7.3@70.875,55.5
DM3IN2: U6.27 U7.4 | length 15.9
  Top Layer w0.254: U6.27 57.923,55.127 57.923,54.465 59.388,53 62,53 63.1,51.9 67.5,51.9 69.79,54.19 70.754,54.19 U7.4
DMSLEEP: U6.26 U7.5 | length 16.9
  Top Layer w0.254: U6.26 57.123,55.127 57.123,54.465 59.331,52.257 59.795,52.257 61.052,51 68.1,51 69.968,52.868 70.702,52.868 U7.5
DMTIN1: U6.5 U8.3 | length 16
  Top Layer w0.254: U8.3 61.345,72.555 62.2,71.7 62.2,70.558 62.8,69.958 62.8,66.53 62.5,66.23 v1(62.5,63.173)
  Bottom Layer w0.254: v1(62.5,63.173) 63.7,61.973 63.7,60.447 63.182,59.929 v1(63.177,59.929)
DSIN1: U6.8 U8.4 | length 13
  Top Layer w0.254: U8.4 62.615,73.861 63.7,72.776 63.7,62.448 63.552,62.3 U6.8
DSIN2: U6.7 U8.5 | length 14.5
  Top Layer w0.254: U6.7 63.348,61.648 63.897,61.648 63.947,61.698 64.06,61.698 64.7,62.338 64.7,73.254 64.528,73.426 64.528,73.576 64.379,73.725 64.058,73.725 63.885,73.898 U8.5
GND: C1.1 C2.1 C3.1 C4.1 C5.1 C6.2 C8.1 C9.1 C10.1 C11.1 C12.1 C14.1 C15.1 C16.2 C26.1 C27.1 C28.1 C29.1 C30.1 C31.1 C32.1 C34.1 C37.1 C38.1 C39.1 C40.1 C41.1 C42.1 C43.1 C44.1 C45.1 C46.1 C47.1 C48.1 C49.1 J3.1 J12.2 J12.5 J16.1 Q1.4 R2.1 R3.1 R5.1 R7.1 R10.1 R12.1 R14.1 R16.1 U2.4 U4.9 U4.15 U5.6 U5.8 U5.11 U5.14 U7.9 U7.15 U8.9 U8.15 U9.6 U9.8 U9.11 U9.14 U10.6 U10.8 U10.11 U10.14 | length 18.5
  Top Layer w0.254: U9.14 87.067,57.875 87.454,57.875 87.696,58.117 87.696,59.373 ; U9.11 87.696,59.373 ; U10.14 87.138,45.989 87.525,45.989 87.767,46.231 87.767,47.487 ; U10.11 87.767,47.487 ; U5.14 87.148,69.896 87.535,69.896 87.773,70.134 87.773,71.351 87.73,71.394 ; U5.11 87.73,71.394 ; U9.8@88.588,59.85 88.588,59.773 88.542,59.727 88.542,59.587 88.35,59.396 87.963,59.396 87.94,59.373 87.696,59.373 ; U10.8@88.659,47.964 88.659,47.748 88.398,47.487 87.767,47.487 ; U5.8@88.669,71.871 88.669,71.794 88.623,71.748 88.623,71.609 88.431,71.417 88.044,71.417 88.021,71.394 87.73,71.394
  Top Layer w0.5: U8.15 60.125,80.236 60.125,82.191 C37.1 ; U7.9 U7.9@76.675,49.181 ; U7.15 76.675,56.801 78.654,56.801 v1(78.804,56.65) ; U4.9 U4.9@76.675,60.26 ; U4.15 78.524,67.93 v1(78.804,67.65)
  other v1: 88.15,42.025 78.55,43.2 84.25,44.65 91.091,45.446 91.086,46.737 91.091,47.946 76.625,48.275 84.325,48.775 84.7,50.7 88.433,52.057 86.35,53.025 88.408,53.602 84.942,54.88 83.6,56.6 91.115,57.477 91.015,58.623 76.6,59.2 91.115,59.727 84,62.2 88.5,63.9 86.3,64 83.7,65.4 86.4,65.4 88.5,65.4 83.671,68.044 91.046,69.382 91.096,70.644 76,71 91.046,71.882 75.35,73.75 84.4,74.175 87.592,74.371 73.598,75.742 88,76.4 71.3,77.2 90.8,77.5 83.509,78.294 80.8,78.3 80.8,80.7 72.2,81 56.8,81.3 67,81.6 71.3,82.4 91.675,82.4 92.575,82.4 91.675,83.275 92.55,83.275 60.302,83.461 63.1,83.6 72.6,84.5 81.2,86 81.9,86 82.6,86 83.3,86 84,86 76.5,86.5 79.104,86.5 93,86.8 81.99,87.331 81.2,88.6 81.9,88.6 82.6,88.6 83.3,88.6 84,88.6
INFR: J13.3 U6.3 | length 22.4
  Bottom Layer w0.254: J13.3 54.97,45.77 60.2,51 60.2,55.3 v1(63.2,58.3)
LED1: D5.1 U6.2 | length 2.6
  Bottom Layer w0.254: v1(63.2,57.5) 64.468,56.232 64.468,55.816 D5.1
LED2: D6.1 U6.6 | length 1.3
  Bottom Layer w0.254: D6.1@61.8,60.7 v1(63.148,60.7)
M1ENC1: J7.3 U6.30 | length 19.2
  Top Layer w0.254: v1(56.125,61.94) 56.178,61.94 56.46,61.658 56.52,61.658 60.175,58.004 U6.30
  Bottom Layer w0.254: J7.3 48.636,69.069 49.435,69.069 56.125,62.379 v1(56.125,61.94)
M1ENC2: J7.4 U6.29 | length 21.2
  Top Layer w0.254: v1(56.083,60.517) 56.083,59.617 59.227,56.473 59.227,55.423 U6.29
  Bottom Layer w0.254: J7.4 46,70.137 46.344,69.793 46.344,69.788 48.501,67.632 49.354,67.632 52.7,64.286 52.7,63.9 v1(56.083,60.517)
M1IN1: U4.14 U5.9 | length 18
  Top Layer w0.254: U4.14 79.56,66.66 81.3,68.4 81.3,72.6 82.148,73.448 87.722,73.448 88.169,73.001 88.169,72.046 U5.9
M1IN2: U4.13 U5.10 | length 17.4
  Top Layer w0.254: U4.13 76.667,65.432 77.732,65.432 78,65.7 81.233,65.7 82.8,67.267 82.8,71.915 83.833,72.948 86.938,72.948 87.671,72.215 U5.10
M2ENC1: J10.3 U6.18 | length 21.2
  Top Layer w0.254: J10.3 50.348,75.955 50.348,61.949 50.649,61.648 54.602,61.648 U6.18
M2ENC2: J10.4 U6.19 | length 25
  Top Layer w0.254: J10.4 45.96,78.92 48.206,76.674 48.909,76.674 49.546,76.037 49.546,61.46 49.9,61.106 52.582,61.106 52.84,60.848 54.602,60.848 U6.19
M2IN1: U4.12 U9.9 | length 13.6
  Top Layer w0.254: U4.12 77.2,64.12 77.52,63.8 85.1,63.8 88.088,60.812 88.088,60.025 U9.9
M2IN2: U4.11 U9.10 | length 12.2
  Top Layer w0.254: U4.11 84.934,62.85 87.59,60.194 U9.10
M3ENC1: J11.3 U6.9 | length 28.3
  Top Layer w0.254: J11.3 50.5,84.5 50.5,79.342 57.923,71.919 57.923,71.525 60.9,68.548 60.9,66.63 61.649,65.881 61.649,63.851 U6.9
M3ENC2: J11.4 U6.11 | length 31.9
  Top Layer w0.254: J11.4 45.96,87.617 46.713,86.864 46.787,86.79 46.787,85.825 46.966,85.647 46.966,84.813 46.787,84.635 46.787,83.801 46.713,83.726 ; 46.712,83.726 46.648,83.661 ccw(c46.7,82.56) 45.921,81.781 ccw(c48.802,84.662) 48.608,80.592 57.469,71.731 57.469,71.337 59.7,69.106 59.7,64.862 59.977,64.585 59.977,64.472 60.027,64.422 60.027,63.873 U6.11
M3IN1: U7.14 U10.9 | length 15.9
  Top Layer w0.254: U7.14 77.2,55.581 77.581,55.2 83.2,55.2 88.159,50.241 88.159,48.139 U10.9
M3IN2: U7.13 U10.10 | length 14
  Top Layer w0.254: U7.13 82.189,54.311 87.661,48.839 U10.10
MSLEEP: U5.3 U7.12 U9.3 U10.3 | length 62.2
  Top Layer w0.254: U9.3@88.588,57.05 88.588,56.973 88.542,56.927 88.542,56.645 87.723,55.827 78.016,55.827 77.635,56.208 75.431,56.208 75.423,56.2 ; U5.3@88.625,69.244 88.625,68.669 84.703,64.747 75.615,64.747 75.423,64.555 75.423,56.2 ; U10.3@88.659,45.145 88.613,45.099 88.613,44.76 87.757,43.904 83.717,43.904 83,44.621 83,51.3 81.259,53.041 76.213,53.041 75.423,53.83 75.423,56.2
MTIN1: J16.2 U8.14 | length 6
  Top Layer w0.254: J16.2 61.345,83.645 U8.14
NetC13_1: C13.1 L1.1 U2.5
NetC13_2: C13.2 U2.6 | length 2.7
  Top Layer w0.3: C13.2 84.893,80.447 85.268,80.447 85.672,80.851 85.672,81.146 86.076,81.55 86.371,81.55 U2.6
NetC16_1: C16.1 U2.7 | length 4.5
  Top Layer w0.254: U2.7 86.544,81.027 86.956,81.027 87.332,80.651 87.332,79.988 87.598,79.723 89.048,79.723 C16.1
NetD1_2: D1.2 R3.2 | length 2.4
  Bottom Layer w0.254: D1.2 74.456,80.844 74.456,80.557 R3.2
NetD2_2: D2.2 R4.2 | length 2.4
  Bottom Layer w0.254: R4.2 48.847,50.317 49.102,50.317 D2.2
NetD5_2: D5.2 R9.2 | length 2.4
  Bottom Layer w0.254: R9.2 65.123,56.977 65.123,56.711 D5.2
NetD6_2: D6.2 R13.2 | length 2.4
  Bottom Layer w0.254: D6.2 61.377,61.573 61.377,61.877 R13.2
NetJ2_1: J2.1 Q1.5
  other v1: 88.25,84.5 89.25,84.5 90.25,84.5 91.25,84.5 88.25,85.5 89.25,85.5 90.25,85.5 91.25,85.5 88.25,86.5 89.25,86.5 90.25,86.5 91.25,86.5 88.25,87.5 89.25,87.5 90.25,87.5 91.25,87.5 88.25,88.5 89.25,88.5 90.25,88.5 91.25,88.5
NetJ4_1: J4.1 U5.7 | length 2.9
  Top Layer w0.5: U5.7 J4.1@89.946,73.696 ; J4.1@90.946,73.696 J4.1@91.5,74.25
NetJ5_1: J5.1 U5.5 | length 2.9
  Top Layer w0.5: U5.5 89.946,67.592 J5.1
NetJ8_1: J8.1 U9.7 | length 3
  Top Layer w0.5: U9.7 89.865,61.593 J8.1
NetJ9_1: J9.1 U9.5 | length 3
  Top Layer w0.5: U9.5 89.865,55.652 J9.1
NetJ14_1: J14.1 U10.7 | length 2.9
  Top Layer w0.5: U10.7 89.936,49.779 J14.1
NetJ15_1: J15.1 U10.5 | length 2.9
  Top Layer w0.5: U10.5 89.936,43.696 J15.1
NetR1_1: R1.1 R2.2 U2.8 | length 3.6
  Top Layer w0.254: R1.1 86.665,79.269 86.521,79.269 U2.8 ; R1.1 R2.2
NetR5_2: R5.2 U5.13 | length 2
  Top Layer w0.254: R5.2 86.499,70.924 86.499,70.654 86.757,70.396 87.144,70.396 U5.13
NetR7_2: R7.2 U5.2 | length 3.4
  Top Layer w0.254: R7.2 87.102,68.617 87.931,68.617 88.169,68.855 88.169,69.242 U5.2
NetR8_2: R8.2 U6.31 | length 5.4
  Top Layer w0.254: U6.31 61,55.25 v1(61,54.9)
  Bottom Layer w0.254: v1(61,54.9) 61,54.853 61.2,54.653 v1(61.2,50)
NetR10_2: R10.2 U9.13 | length 1.9
  Top Layer w0.254: R10.2 86.418,58.816 86.418,58.632 86.675,58.375 87.063,58.375 U9.13
NetR12_2: R12.2 U9.2 | length 3.3
  Top Layer w0.254: R12.2 86.059,57.47 86.455,57.47 87.329,56.596 87.85,56.596 88.088,56.833 88.088,57.221 U9.2
NetR14_2: R14.2 U10.13 | length 2
  Top Layer w0.254: R14.2 86.489,47.034 86.489,46.747 86.746,46.489 87.134,46.489 U10.13
NetR16_2: R16.2 U10.2 | length 3.5
  Top Layer w0.254: R16.2 86.129,45.689 86.421,45.689 87.4,44.71 87.921,44.71 88.113,44.902 88.113,45.337 U10.2@88.209,45.337
NRST: C35.2 J6.10 U6.4 | length 12.6
  Top Layer w0.254: U6.4 v1(64.725,59.1)
  Bottom Layer w0.254: v1(59.3,51.6) 59.29,51.61 59.29,56.29 61.852,58.852 64.552,58.852 C35.2@64.6,58.9
SIN1: J12.6 U8.13 | length 6.6
  Top Layer w0.254: U8.13 62.754,80.325 62.754,81.254 65.75,84.25 J12.6
SIN2: J12.1 U8.12 | length 12.8
  Top Layer w0.254: U8.12 63.885,81.635 66.894,84.644 66.894,85.486 68.207,86.8 70.9,86.8 J12.1
SWCLK: J6.04 U6.24 | length 6.6
  Top Layer w0.254: U6.24 54.75,52.222 54.907,52.065 54.907,51.952 55.056,51.803 55.237,51.803 55.48,51.56 J6.04
SWDIO: J6.02 U6.23 | length 8
  Top Layer w0.254: J6.02 54.21,55.778 53.698,56.29 53.698,57.11 53.89,57.302 54.003,57.302 54.053,57.352 54.602,57.352 U6.23
USB+5: C7.2 C17.2 J1.1 J13.1 U1.5 U3.1 U3.3 | length 27.7
  Top Layer w0.5: U3.3 46.571,50.415 46.371,50.615 ; U3.1 47.401,52.265 46.608,52.265 46.572,52.228 ; J13.1 47.3,44.47 47.3,47.6 46.371,48.529 46.371,50.615 ; C7.2 50.2,55.371 50.2,55.1 48.715,53.615 46.864,53.615 46.572,53.322 46.572,52.228 ; C7.2@50.65,55.596 50.65,56.071 51.704,57.125 52.129,57.125 52.179,57.175 v1(52.179,57.375) ; 46.371,50.615 C17.2 46.272,51.965 46.308,51.965 46.572,52.228
  Bottom Layer w0.5: v1(48.175,59.7) 48.175,57.593 48.468,57.3 52.104,57.3 v1(52.179,57.375)
USBdata_N: J1.2 U1.3 U6.21 | length 7.8
  Top Layer w0.26: J1.2 48.245,58.98 48.847,58.98 48.872,58.955 49.159,58.955 49.909,59.705 50.109,59.705 U1.3@50.279,59.875 ; U1.3 U1.3@50.279,59.875 ; U6.21 54.605,58.955 54.028,58.955 54.003,58.93 52.757,58.93 52.732,58.955 50.92,58.955 50.449,59.426 50.449,59.705 U1.3@50.279,59.875
USBdata_P: J1.3 U1.4 U6.22 | length 7.8
  Top Layer w0.26: J1.3 48.245,58.47 48.847,58.47 48.872,58.495 49.159,58.495 49.909,57.745 50.109,57.745 U1.4@50.279,57.575 ; U1.4 U1.4@50.279,57.575 ; U6.22 54.605,58.445 54.028,58.445 54.003,58.47 52.567,58.47 52.542,58.495 50.92,58.495 50.449,58.024 50.449,57.745 U1.4@50.279,57.575
VBAT: C8.2 C9.2 C10.2 C11.2 C12.2 C14.2 C15.2 C27.2 C28.2 C29.2 C30.2 C31.2 C32.2 C38.2 C39.2 C40.2 C41.2 C42.2 C43.2 C44.2 C45.2 C46.2 C47.2 C48.2 C49.2 Q1.1 Q1.2 Q1.3 U2.3 U5.4 U9.4 U10.4 | length 52.7
  Bottom Layer w0.254: C48.2 89.13,69.444 89.653,68.921 C48.2@89.32,69.254 ; C42.2@88.958,45.787 89.222,45.787 C42.2@89.731,45.277 ; C42.2@88.958,45.8 C42.2@89.208,45.8
  Bottom Layer w1: C8.2 86.249,82.1 90,82.1 91.581,80.519
  Bottom Layer w3: 83.317,83.4 83.097,83.619 80.878,83.619 78.129,80.87 78.129,78.162 81.071,75.219 81.071,47.78 82.138,46.712 83.606,46.712
  other v1: 89.235,45.363 89.235,46.011 89.235,46.737 89.235,47.395 89.235,48.063 89.159,57.317 89.159,57.978 89.159,58.634 89.159,59.254 89.159,59.921 89.25,69.184 89.25,69.902 89.25,70.602 89.25,71.322 89.25,72.002 91.581,79.919 92.254,79.919 91.575,81.075 92.25,81.075
pads on no net: J1.4 J1.S1 J1.S2 J1.S3 J1.S4 J1.S5 J1.S6 J6.06 J6.07 J6.08 J7. J10. J11. J12. J13. J13.2 J16. J16.3 J16.4 U1.1 U2.1 U2.2 U3.4 U4.7 U5.1 U5.12 U6.20 U7.6 U7.7 U7.11 U8.6 U8.7 U8.11 U9.1 U9.12 U10.1 U10.12

## Polygon pours and split planes (outlines as drawn)
GND on Bottom Layer "GND_L04_P006" (solid, remove dead copper, pour order 6): 55,89.5 55,81.5 57.5,79 67.3,79 72.3,74 75.1,74 75.1,40.5 93.5,40.5 93.5,89.5
DGND on Bottom Layer "DGND_L04_P002" (solid, remove dead copper, pour order 2): 44.5,40.5 72,40.5 72,72 68.5,75.5 54.4,75.5 51,78.9 51,89.5 44.5,89.5
GND on Top Layer "GND_SWREG_IN" (solid, pour order 12): 87.721,81.9 87.725,81.904 87.725,83.7 93.216,83.7 93.216,81.9
VBAT on Top Layer "VBAT_L01_P005" (solid, remove dead copper, pour order 5): 87.721,81.692 87.729,81.7 93.15,81.7 93.15,79.269 87.725,79.269
NetC13_1 on Top Layer "NETC13_1_L01_P000" (solid, pour order 0): 86.925,83 86.925,79.625 81.333,79.625 81.333,82.992 81.3,83.025
GND on Top Layer "GND_L01_P015" (solid, remove dead copper, pour order 15): 55,89.5 55,81.5 57.5,79 67.3,79 72.3,74 75.1,74 75.1,40.5 93.5,40.5 93.5,89.5
DGND on Top Layer "DGND_L01_P014" (solid, remove dead copper, pour order 14): 44.5,40.5 72,40.5 72,72 68.5,75.5 54.4,75.5 51,78.9 51,89.5 44.5,89.5
GND on GND1 "GND_L02_P009" (solid, remove dead copper, pour order 9): 55,89.5 93.5,89.5 93.5,40.5 75.1,40.5 75.1,74 72.3,74 67.37,78.93 57.57,78.93 55,81.5 55,81.617
DGND on GND1 "DGND_L02_P008" (solid, remove dead copper, pour order 8): 44.5,89.5 51,89.5 51,78.9 54.4,75.5 68.5,75.5 72,72 72,40.5 44.5,40.5
GND on GND "GND_L03_P011" (solid, remove dead copper, pour order 11): 55,89.5 93.5,89.5 93.5,40.5 75.1,40.5 75.1,74 72.3,74 67.37,78.93 57.57,78.93 55,81.5 55,81.617
DGND on GND "DGND_L03_P010" (solid, remove dead copper, pour order 10): 51,89.5 51,78.9 54.407,75.493 68.507,75.493 72,72 72,40.5 44.5,40.5 44.5,89.5

## Other copper
Top Layer:
  region net +5: 75.6,85.75 74.775,84.925 74.775,74.525 76.154,74.525 78.875,77.246 78.875,84.35 79.9,84.35 80.007,84.457 80.007,85.751
Bottom Layer:
  rectangle net VBAT: 91.175,79.425 92.625,81.575
  rectangle net VBAT: 84.9,84.4 86.9,87.5
  rectangle net VBAT: 79.7,81.6 86.933,85.2
  region net VBAT: 89.803,68.795 82.25,68.795 82.25,71.898 82.604,71.898 85.09,71.898 85.404,72.212 89.791,72.212
  region net VBAT: 89.865,60.477 89.865,57.073 82.66,57.073 82.25,57.073 82.25,60.127 83.64,60.127 83.722,60.127 85.127,60.127 85.474,60.474
  region net VBAT: 89.947,45.201 89.946,45.199 82.94,45.199 82.94,48.315 82.969,48.315 85.317,48.315 85.613,48.611 85.625,48.599 90.006,48.599

## Silkscreen, mask and mechanical layers (free items; w line width, h text height)
Top Overlay:
  text "-" at 85.977,87.77 h1.52
  text "+" at 92.479,87.575 h1.52
  text "M1" at 50.379,82.804 h1.52
  text "Servo" at 64.329,82.154 h1.52
  text "MT" at 55.279,82.129 h1.52
  text "M2" at 50.329,76.354 h1.52
  text "1" at 92.504,73.579 h1.52
  text "M1" at 83.997,73.097 h1.52
  text "M3" at 50.204,69.929 h1.52
  text "2" at 92.279,66.354 h1.52
  text "1" at 92.454,61.604 h1.52
  text "M2" at 83.916,60.989 h1.52
  text "2" at 92.254,54.254 h1.52
  text "1" at 92.429,49.629 h1.52
  text "M3" at 83.979,49.079 h1.52
  text "Prog" at 60.654,45.462 h1.52
  text "2" at 92.279,42.354 h1.52
  text "Infra" at 50.329,41.204 h1.52
Bottom Overlay:
  text "OWO" at 50.275,67.455 h15.24
  text "Hi... rgrds, Artur Eksi" at 82.078,40.962 h1.52